# EAGLE board Tesseract_DC_Geared_Vero (12x12) (EAGLE 7.7.0)
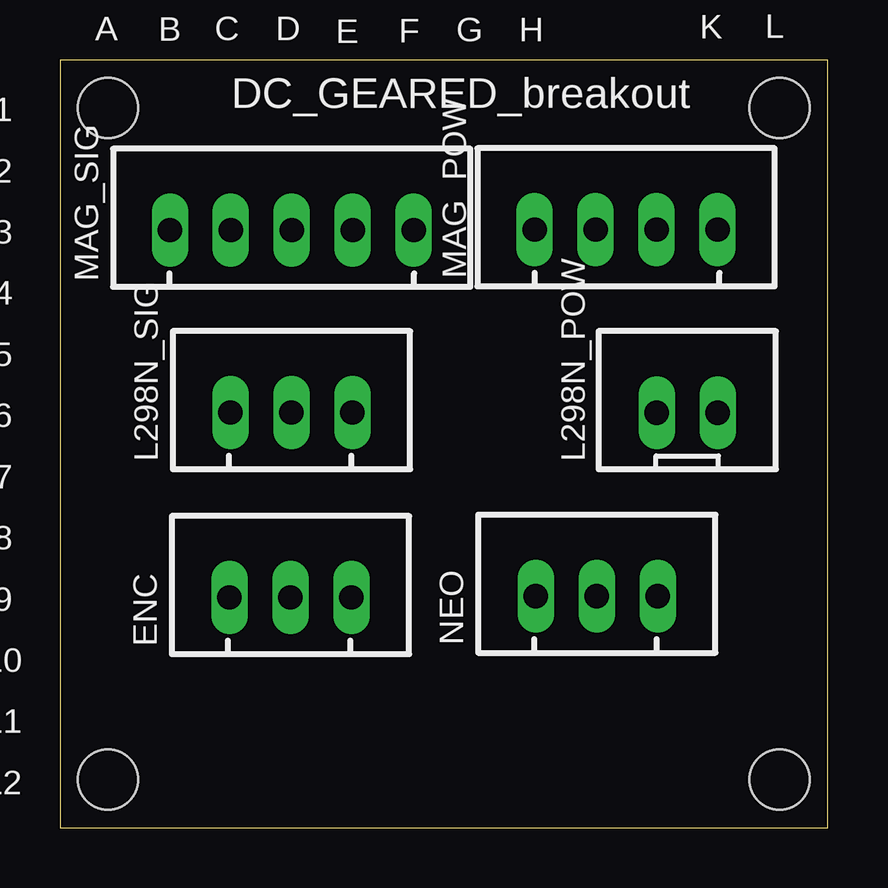
[diagram p0: board, top side]
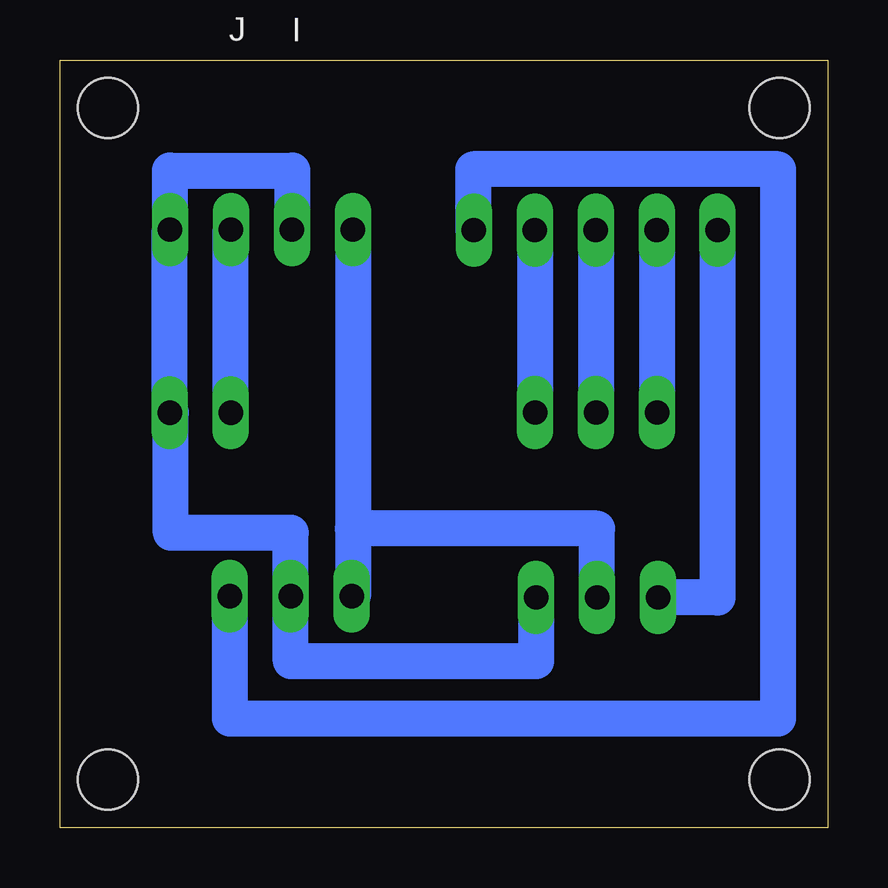
[diagram p1: board, bottom side, seen from below]

Size 32 x 32 mm. Coordinates in mm from the lower left corner, seen from the top.
Outline: 0,0 32,0 32,32 0,32 0,0
Copper layers (1*16): Top 0.035mm / dielectric 1.5mm / Bottom 0.035mm
Design rules "default": minimum track width 10mil, minimum drill 24mil, track to track 8mil, track to pad 8mil, pad to pad 8mil, via to via 8mil, smd to smd 8mil, copper to edge 40mil, drill to drill 8mil, minimum pad ring 10mil, minimum via ring 8mil, stop-mask expansion 4mil, vias tented up to drill 0mil, thermal gap 10mil
Holes 2.5 mm at 30,2 2,2 30,30 2,30

## Footprints (pad centres in the part's own frame; a part is rotated, then mirrored left to right if it is on the bottom)
JST-XH-03-PACKAGE-LONG-PAD = drill 1.016 long: 1 -2.54,0; 2 0,0; 3 2.54,0
JST-XH-02-PACKAGE-LONG-PAD = drill 1.016 long: 1 -1.27,0; 2 1.27,0
JST-XH-04-PACKAGE-LONG-PAD = drill 1.016 long: 1 -3.81,0; 2 -1.27,0; 3 1.27,0; 4 3.81,0
JST-XH-05-PACKAGE-LONG-PAD = drill 1.016 long: 1 -5.08,0; 2 -2.54,0; 3 0,0; 4 2.54,0; 5 5.08,0

## Placement (x,y rotation side)
ENC  [JST-XH-03-PACKAGE-LONG-PAD]  9.61,9.59 0 top
L298N_POW  [JST-XH-02-PACKAGE-LONG-PAD]  26.15,17.3 0 top
L298N_SIG  [JST-XH-03-PACKAGE-LONG-PAD]  9.65,17.3 0 top
MAG_POW  [JST-XH-04-PACKAGE-LONG-PAD]  23.6,24.93 0 top
MAG_SIG  [JST-XH-05-PACKAGE-LONG-PAD]  9.66,24.91 0 top
NEO  [JST-XH-03-PACKAGE-LONG-PAD]  22.38,9.64 0 top
U$15  [12X12]  16,30 0 top

## Library data of the parts
ENC L298N_POW L298N_SIG MAG_POW MAG_SIG NEO = Rembrandt Electronics - JST XH Connectors v1-0
U$15 = pinhead_1x14_no_frame MOD

## Nets
5V_GND: ENC.3 L298N_POW.2 MAG_POW.2 MAG_POW.4 NEO.2
5V_VCC: ENC.2 MAG_POW.1 NEO.1
12V_VCC: L298N_POW.1 MAG_POW.3
PIN3: ENC.1 MAG_SIG.1
PIN4: L298N_SIG.1 MAG_SIG.2
PIN5: L298N_SIG.2 MAG_SIG.3
PIN6: L298N_SIG.3 MAG_SIG.4
PIN7: MAG_SIG.5 NEO.3

## Tracks (layer width: path | path; a pad name or v marks a point on that pad's centre or on a via)
5V_GND
  Bottom 0.406: NEO.2 | 27.38,17.3 L298N_POW.2 | 27.42,24.93 MAG_POW.4 | 22.32,24.93 MAG_POW.2
  Bottom 1.5: ENC.3 12.15,6.93 22.38,6.93 NEO.2 | NEO.2 22.38,12.29 27.38,12.29 27.38,17.3 | L298N_POW.2 27.42,24.93 | MAG_POW.4 27.41,27.39 22.32,27.39 22.32,24.93
5V_VCC
  Bottom 0.406: 19.79,9.64 NEO.1
  Bottom 1.5: MAG_POW.1 19.79,12.46 | 19.79,12.46 19.79,9.64 | ENC.2 9.61,12.46 19.79,12.46
12V_VCC
  Bottom 0.406: 24.88,24.93 MAG_POW.3
  Bottom 1.5: L298N_POW.1 24.88,24.93
PIN3
  Bottom 1.5: MAG_SIG.1 4.58,9.59 ENC.1
PIN4
  Bottom 0.406: 7.12,17.3 L298N_SIG.1
  Bottom 1.5: MAG_SIG.2 7.12,17.3
PIN5
  Bottom 0.406: 9.66,17.3 L298N_SIG.2
  Bottom 1.5: MAG_SIG.3 9.66,17.3
PIN6
  Bottom 0.406: 12.2,17.3 L298N_SIG.3
  Bottom 1.5: MAG_SIG.4 12.2,17.3
PIN7
  Bottom 0.406: 14.78,24.91 MAG_SIG.5
  Bottom 1.5: NEO.3 24.92,4.54 2.06,4.54 2.06,27.44 14.78,27.44 14.78,24.91

## Text on the board
tPlace: A | B | C | D | E | F | G | H | K | L | 1 / 2 / 3 / 4 / 5 / 6 / 7 / 8 / 9 / 10 / 11 / 12
bPlace: I | J
tNames: DC_GEARED_breakout